# EAGLE board Voltmetro_3Digit_HADDAOUI (EAGLE 6.1)
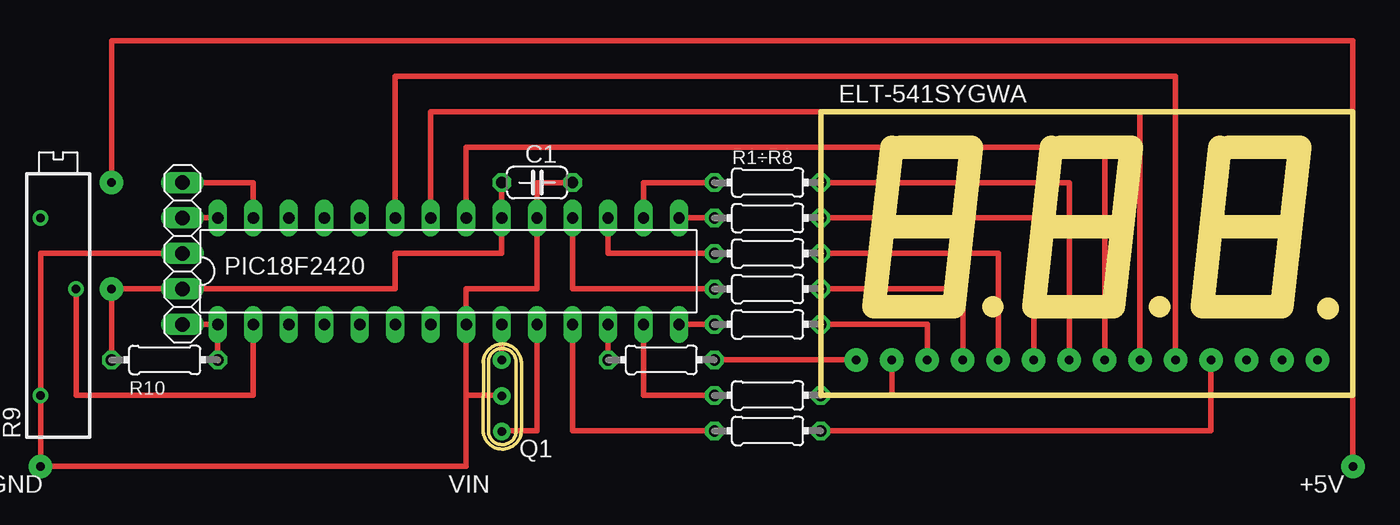
[diagram p0: board, top side]
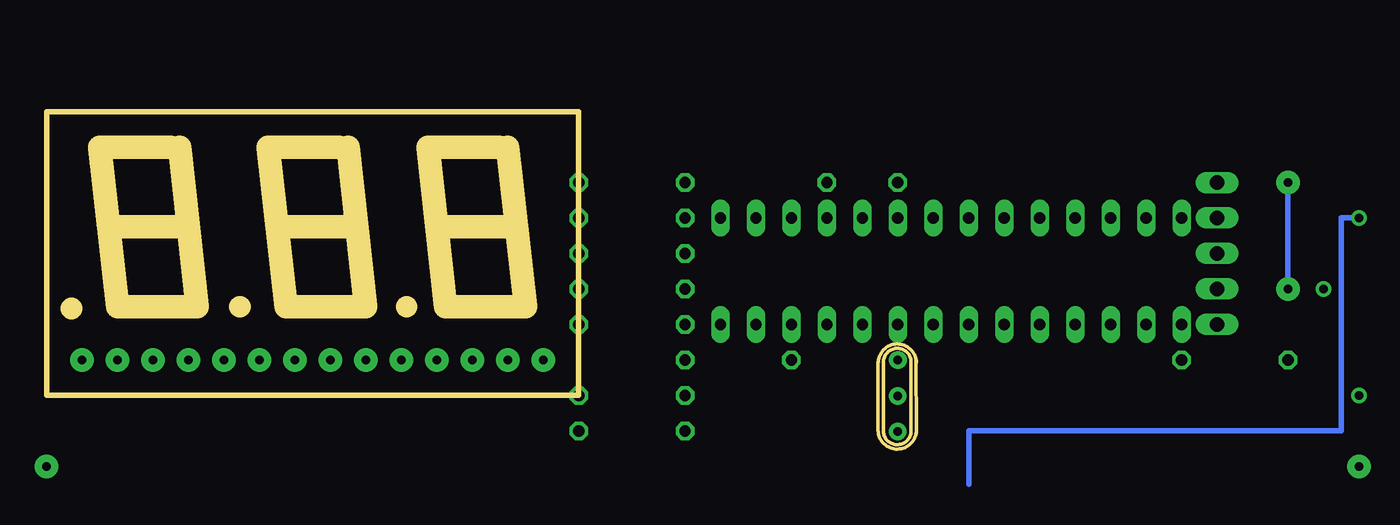
[diagram p1: board, bottom side, seen from below]

Size 62.29 x 24.16 mm. Coordinates in mm from the lower left corner, seen from the top.
Outline: 29.27,21.62 28,10.19 33.72,10.19 34.99,21.62 29.91,21.62
Outline: 29.27,15.91 33.72,15.91
Outline: 40.7,21.62 39.43,10.19 45.15,10.19 46.42,21.62 41.34,21.62
Outline: 40.7,15.91 45.15,15.91
Outline: 52.77,21.62 51.5,10.19 57.21,10.19 58.48,21.62 53.4,21.62
Outline: 52.77,15.91 57.21,15.91
Outline: 0.38,1.19 0.38,6.33 arc-174 2.37,6.19 2.37,1.36 arc-174 0.38,1.19
Outline: 0.38,1.19 0.38,1.13
Outline: 0,6.19 arc-174 2.73,6.26
Outline: 0.03,1.13 arc174 2.74,1.48 2.77,6.27
Outline: 0,1.14 0.03,6.44
Outline: 24.19,24.16 62.29,24.16 62.29,3.84 24.19,3.84 24.19,24.16
Outline: circle at 60.52,10.07 radius 0.25
Outline: circle at 36.51,10.19 radius 0.25
Outline: circle at 48.45,10.19 radius 0.25
Copper layers (1*16): Top 0.035mm / dielectric 1.5mm / Bottom 0.035mm
Design rules: minimum track width 10mil, minimum drill 24mil, track to track 8mil, track to pad 8mil, pad to pad 8mil, via to via 8mil, smd to smd 8mil, copper to edge 40mil, drill to drill 8mil, minimum pad ring 10mil, minimum via ring 8mil, stop-mask expansion 4mil, vias tented up to drill 0mil, thermal gap 10mil

## Footprints (pad centres in the part's own frame; a part is rotated, then mirrored left to right if it is on the bottom)
C050-024X044 = drill 0.813 octagon: 1 -2.54,0; 2 2.54,0
1X05 = drill 1.016 long: 1 -5.08,0; 2 -2.54,0; 3 0,0; 4 2.54,0; 5 5.08,0
DIL28-3 = drill 0.813 long: 1 -16.51,-3.81; 2 -13.97,-3.81; 3 -11.43,-3.81; 4 -8.89,-3.81; 5 -6.35,-3.81; 6 -3.81,-3.81; 7 -1.27,-3.81; 8 1.27,-3.81; 9 3.81,-3.81; 10 6.35,-3.81; 11 8.89,-3.81; 12 11.43,-3.81; 13 13.97,-3.81; 14 16.51,-3.81; 15 16.51,3.81; 16 13.97,3.81; 17 11.43,3.81; 18 8.89,3.81; 19 6.35,3.81; 20 3.81,3.81; 21 1.27,3.81; 22 -1.27,3.81; 23 -3.81,3.81; 24 -6.35,3.81; 25 -8.89,3.81; 26 -11.43,3.81; 27 -13.97,3.81; 28 -16.51,3.81
0204/7 = drill 0.813 octagon: 1 -3.81,0; 2 3.81,0
RTRIM3006P = drill 0.61: 1 -7.62,1.27; 2 0,-1.27; 3 5.08,1.27

## Placement (x,y rotation side)
C1  100n  [C050-024X044]  3.87,19.08 0 top
JP1  [1X05]  -21.53,14 90 top  (outside the outline)
PIC18F2420  [DIL28-3]  -2.48,12.73 0 top
R1÷R8  220  [0204/7]  20.38,19.08 0 top
R2  220  [0204/7]  20.38,16.54 0 top
R3  220  [0204/7]  20.38,11.46 0 top
R4  220  [0204/7]  20.38,8.92 0 top
R5  220  [0204/7]  12.76,6.38 0 top
R6  220  [0204/7]  20.38,3.84 0 top
R7  220  [0204/7]  20.38,14 0 top
R8  220  [0204/7]  20.38,1.3 0 top
R9  10K  [RTRIM3006P]  -30.42,11.46 90 top  (outside the outline)
R10  10K  [0204/7]  -22.8,6.38 0 top  (outside the outline)

## Library data of the parts
C1 R1÷R8 R2-R10 = rcl
JP1 = pinhead
PIC18F2420 = 40xx

## Nets
S$1: R5.2
S$2: PIC18F2420.18 R3.1
S$3: PIC18F2420.17 R7.1
S$4: PIC18F2420.15 R2.1
S$5: PIC18F2420.16 R1÷R8.1
S$6: PIC18F2420.22
S$7: PIC18F2420.23
S$8: PIC18F2420.21
S$15: C1.1 R10.1
S$16: C1.2 JP1.3 PIC18F2420.19 R9.1
S$17: PIC18F2420.9
S$18: PIC18F2420.10
S$19: PIC18F2420.11 R8.1
S$20: R8.2
S$21: R6.2
S$22: PIC18F2420.12 R5.1
S$23: PIC18F2420.13 R6.1
S$24: PIC18F2420.14 R4.1
S$25: R4.2
S$26: R3.2
S$27: R7.2
S$28: R2.2
S$29: R1÷R8.2
S$30: JP1.4 PIC18F2420.28
S$31: JP1.5 PIC18F2420.27
S$33: JP1.1 PIC18F2420.1 R10.2
S$34: PIC18F2420.2 R9.2
VIN: R9.3

## Tracks (layer width: path | path; a pad name or v marks a point on that pad's centre or on a via)
S$1  (via drill 0.6 pad 1.68)
  Top 0.406: v26.73,6.38 R5.2
S$2
  Top 0.406: R3.1 6.41,11.46 PIC18F2420.18
S$3
  Top 0.406: R7.1 8.95,14 PIC18F2420.17
S$4
  Top 0.406: R2.1 PIC18F2420.15
S$5
  Top 0.406: R1÷R8.1 11.49,19.08 PIC18F2420.16
S$6  (via drill 0.6 pad 1.68)
  Top 0.406: PIC18F2420.22 -3.75,24.16 47.05,24.16 v47.05,6.38
S$7  (via drill 0.6 pad 1.68)
  Top 0.406: PIC18F2420.23 -6.29,26.7 49.59,26.7 v49.59,6.38
S$8  (via drill 0.6 pad 1.68)
  Top 0.406: v44.51,6.38 44.51,21.62 -1.21,21.62 PIC18F2420.21
S$9  (via drill 0.6 pad 1.27)
  other vias: 1.33,6.37
S$10  (via drill 0.6 pad 1.27)
  other vias: 1.35,3.81
S$11  (via drill 0.6 pad 1.27)
  other vias: 1.35,1.25
S$12  (via drill 0.6 pad 1.68)
  other vias: 54.67,6.38
S$13  (via drill 0.6 pad 1.68)
  other vias: 57.21,6.38
S$14  (via drill 0.6 pad 1.68)
  other vias: 59.75,6.38
S$15  (via drill 0.6 pad 1.68)
  Top 0.406: R10.1 v-26.61,11.46 -6.29,11.46 -6.29,14 1.33,14 C1.1 | v-26.61,19.08 -26.61,29.24 62.29,29.24 v62.29,-1.24
  Bottom 0.406: v-26.61,11.46 v-26.61,19.08
S$16  (via drill 0.6 pad 1.68)
  Top 0.406: C1.2 3.87,19.08 PIC18F2420.19 3.87,11.46 -1.21,11.46 -1.21,3.84 | -1.21,3.84 -1.21,-1.24 v-31.69,-1.24 R9.1 -31.69,14 JP1.3 | 1.33,3.84 -1.21,3.84
S$17
  Top 0.406: 1.32,6.41 PIC18F2420.9
S$18
  Top 0.406: PIC18F2420.10 3.87,1.3 1.41,1.3
S$19
  Top 0.406: PIC18F2420.11 6.41,1.3 R8.1
S$20  (via drill 0.6 pad 1.68)
  Top 0.406: R8.2 52.13,1.3 v52.13,6.38
S$21  (via drill 0.6 pad 1.68)
  Top 0.406: R6.2 29.27,3.84 v29.27,6.38
S$22
  Top 0.406: R5.1 PIC18F2420.12
S$23
  Top 0.406: R6.1 11.49,3.84 PIC18F2420.13
S$24
  Top 0.406: R4.1 PIC18F2420.14
S$25  (via drill 0.6 pad 1.68)
  Top 0.406: R4.2 31.81,8.92 v31.81,6.38
S$26  (via drill 0.6 pad 1.68)
  Top 0.406: R3.2 34.35,11.46 v34.35,6.38
S$27  (via drill 0.6 pad 1.68)
  Top 0.406: R7.2 36.89,14 v36.89,6.38
S$28  (via drill 0.6 pad 1.68)
  Top 0.406: R2.2 39.43,16.54 v39.43,6.38
S$29  (via drill 0.6 pad 1.68)
  Top 0.406: R1÷R8.2 41.97,19.08 v41.97,6.38
S$30
  Top 0.406: PIC18F2420.28 JP1.4
S$31
  Top 0.406: PIC18F2420.27 -16.45,19.08 JP1.5
S$33
  Top 0.406: R10.2 PIC18F2420.1 JP1.1
S$34
  Top 0.406: PIC18F2420.2 -16.45,3.84 -29.15,3.84 R9.2
VIN
  Bottom 0.406: R9.3 -30.42,16.54 -30.42,1.3 -3.75,1.3 -3.75,-2.51

## Text on the board
tNames: ELT-541SYGWA | Q1 | GND | VIN | +5V